# EAGLE board sensorboard (EAGLE 9.3.0)
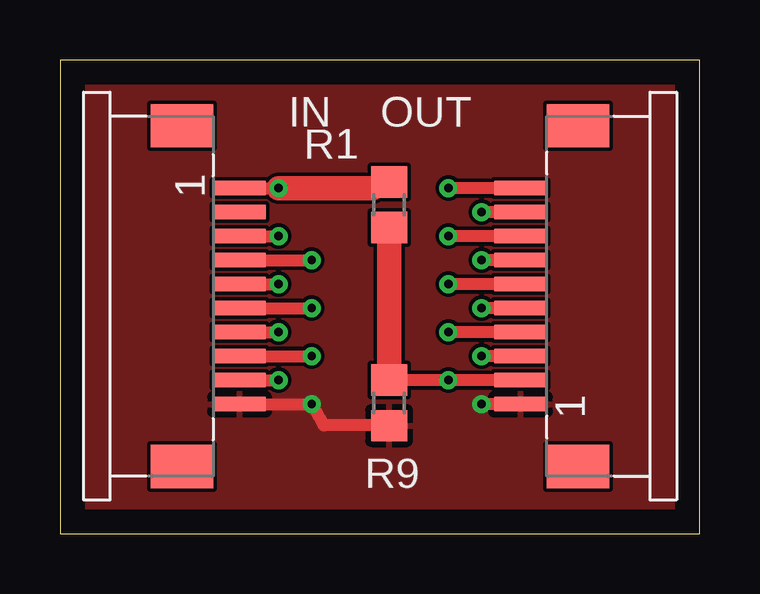
[diagram p0: board, top side]
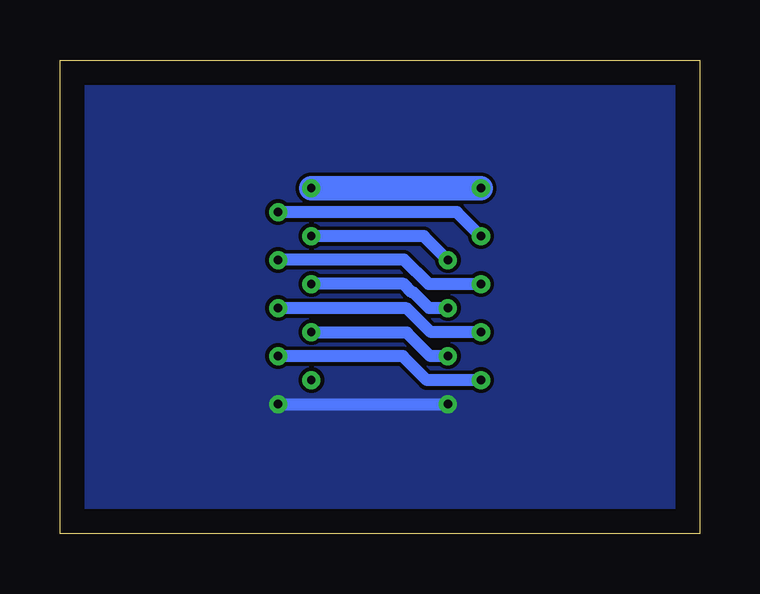
[diagram p1: board, bottom side, seen from below]

Size 26.65 x 19.75 mm. Coordinates in mm from the lower left corner, seen from the top.
Outline: 0,0 26.65,0 26.65,19.75 0,19.75 0,0
Copper layers (1*16): Top 0.035mm / dielectric 1.5mm / Bottom 0.035mm
Design rules "default": minimum track width 6mil, minimum drill 0.35mm, track to track 6mil, track to pad 6mil, pad to pad 6mil, via to via 6mil, smd to smd 6mil, copper to edge 40mil, drill to drill 6mil, minimum pad ring 10mil, minimum via ring 8mil, stop-mask expansion 4mil, vias tented up to drill 0mil, thermal gap 10mil

## Footprints (pad centres in the part's own frame; a part is rotated, then mirrored left to right if it is on the bottom)
68611014422 = smd 0.6 x 2.2: 1 -4.5,2.4; 2 -3.5,2.4; 3 -2.5,2.4; 4 -1.5,2.4; 5 -0.5,2.4; 6 0.5,2.4; 7 1.5,2.4; 8 2.5,2.4; 9 3.5,2.4; 10 4.5,2.4 | smd 1.8 x 2.6: Z1 -7.1,0; Z2 7.1,0
R0805 = smd 1.3 x 1.5: 1 -0.95,0; 2 0.95,0

## Placement (x,y rotation side)
IN  analog  [68611014422]  5.08,9.91 270 top
OUT  analog  [68611014422]  21.59,9.91 90 top
R1  NTC  [R0805]  13.72,13.72 90 top
R9  10K  [R0805]  13.72,5.46 90 top

## Library data of the parts
IN OUT = Wurth_Elektronik_Electromechanic_FPC_Connectors_&_Flat_Flexible_Cable_rev18c
R1 R9 = rcl; SPICEPREFIX: R

## Nets
+5V: IN.1 OUT.10 R1.2
AD2: IN.3 OUT.9
AD3: IN.4 OUT.8
AD4: IN.5 OUT.7
AD5: IN.6 OUT.6
AD6: IN.7 OUT.5
AD7: IN.8 OUT.4
AD8: IN.9 OUT.3
ADB: OUT.2 R1.1 R9.2
AGND: IN.10 OUT.1 R9.1

## Tracks (layer width: path | path; a pad name or v marks a point on that pad's centre or on a via)
+5V  (via drill 0.35)
  Top 0.508: IN.1 v9.11,14.41 | OUT.10 v16.18,14.41
  Top 1.016: v9.11,14.41 13.01,14.41 R1.2
  Bottom 1.016: v9.11,14.41 v16.18,14.41
AD2  (via drill 0.35)
  Top 0.508: IN.3 v9.11,12.41 | OUT.9 v17.56,13.41
  Bottom 0.508: v9.11,12.41 10.11,13.41 v17.56,13.41
AD3  (via drill 0.35)
  Top 0.508: IN.4 v10.49,11.41 | OUT.8 v16.18,12.41
  Bottom 0.508: v10.49,11.41 11.49,12.41 v16.18,12.41
AD4  (via drill 0.35)
  Top 0.508: IN.5 v9.11,10.41 | OUT.7 v17.56,11.41
  Bottom 0.508: v9.11,10.41 11.29,10.41 12.32,11.43 17.54,11.43 v17.56,11.41
AD5  (via drill 0.35)
  Top 0.508: IN.6 v10.49,9.41 | OUT.6 v16.18,10.41
  Bottom 0.508: v10.49,9.41 11.27,9.41 11.92,10.06 11.96,10.06 12.32,10.41 v16.17,10.41 v16.18,10.41
AD6  (via drill 0.35)
  Top 0.508: IN.7 v9.11,8.41 | OUT.5 v17.56,9.41
  Bottom 0.508: v9.11,8.41 11.2,8.41 12.19,9.4 v17.55,9.4 v17.56,9.41
AD7  (via drill 0.35)
  Top 0.508: IN.8 v10.49,7.41 | OUT.4 v16.18,8.41
  Bottom 0.508: v10.49,7.41 11.22,7.41 12.19,8.38 16.16,8.38 v16.18,8.41
AD8  (via drill 0.35)
  Top 0.508: IN.9 v9.11,6.41 | OUT.3 v17.56,7.41
  Bottom 0.508: v9.11,6.41 11.36,6.41 12.36,7.41 v17.56,7.41
ADB  (via drill 0.35)
  Top 0.508: OUT.2 v16.18,6.41 R9.2
  Top 1.016: R1.1 R9.2
AGND  (via drill 0.35)
  Top 0.508: IN.10 v10.49,5.41 11,4.53 13.71,4.52 R9.1 | OUT.1 v17.56,5.41
  Bottom 0.508: v17.56,5.41 v10.49,5.41
  pour Top: 0,19.68 0,0 26.67,0 26.67,19.68
  pour Bottom: 0,19.68 0,0 26.67,0 26.67,19.68